# EAGLE board ATTiny Fuse Reset with 12V Charge Pump - 4layer (EAGLE 7.2.0)
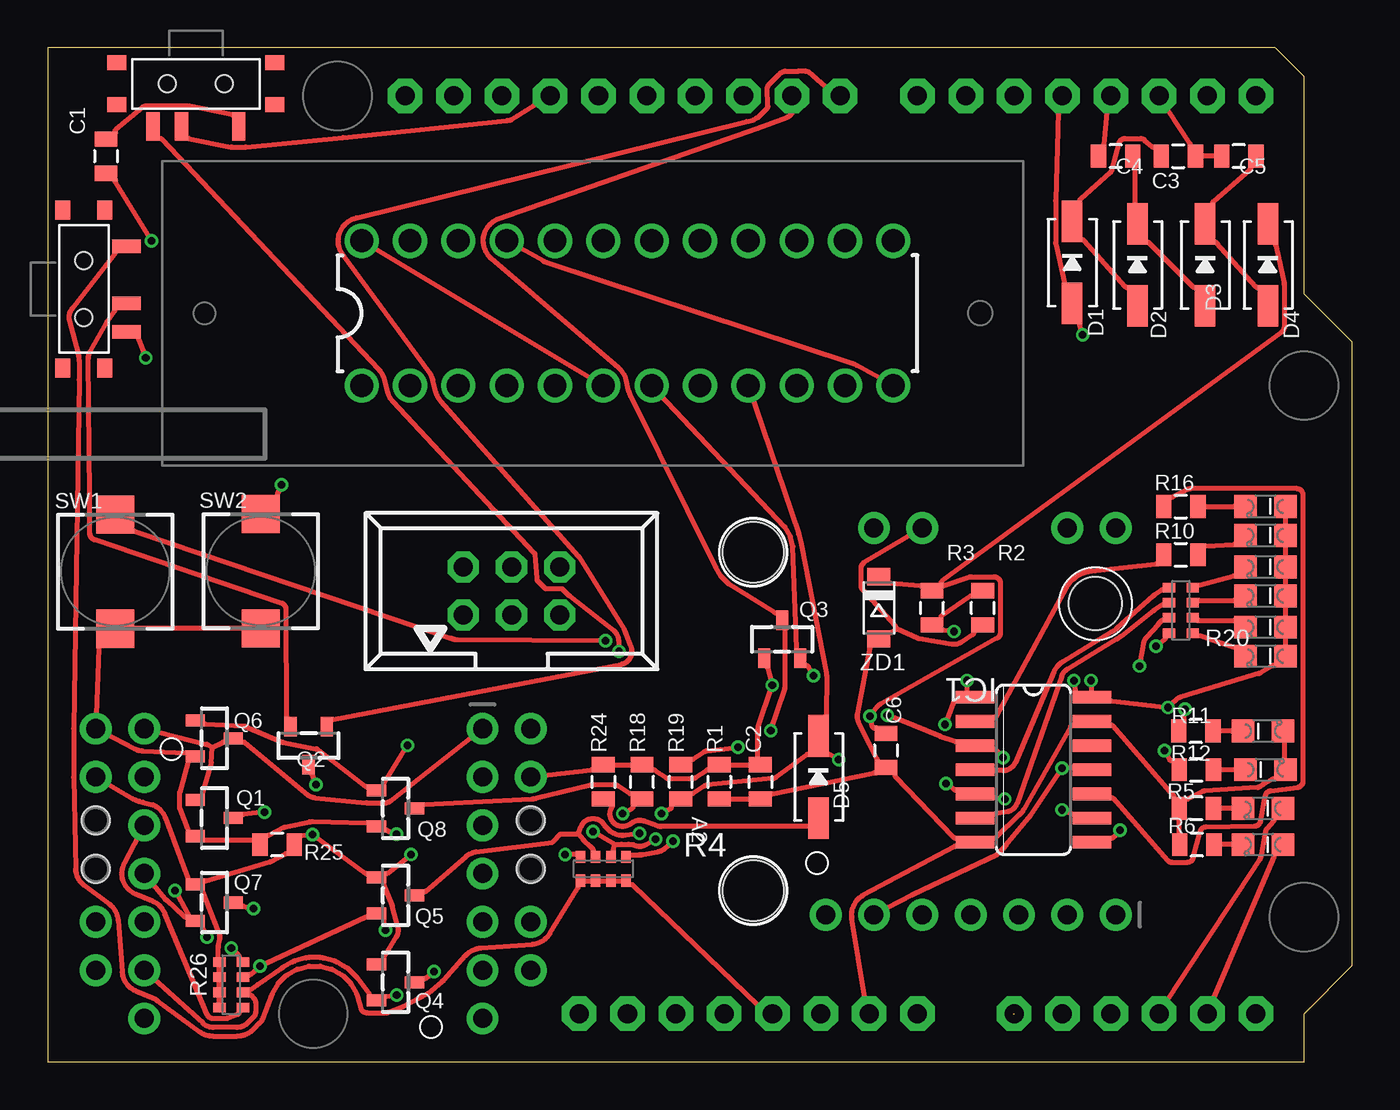
[diagram p0: board, top side]
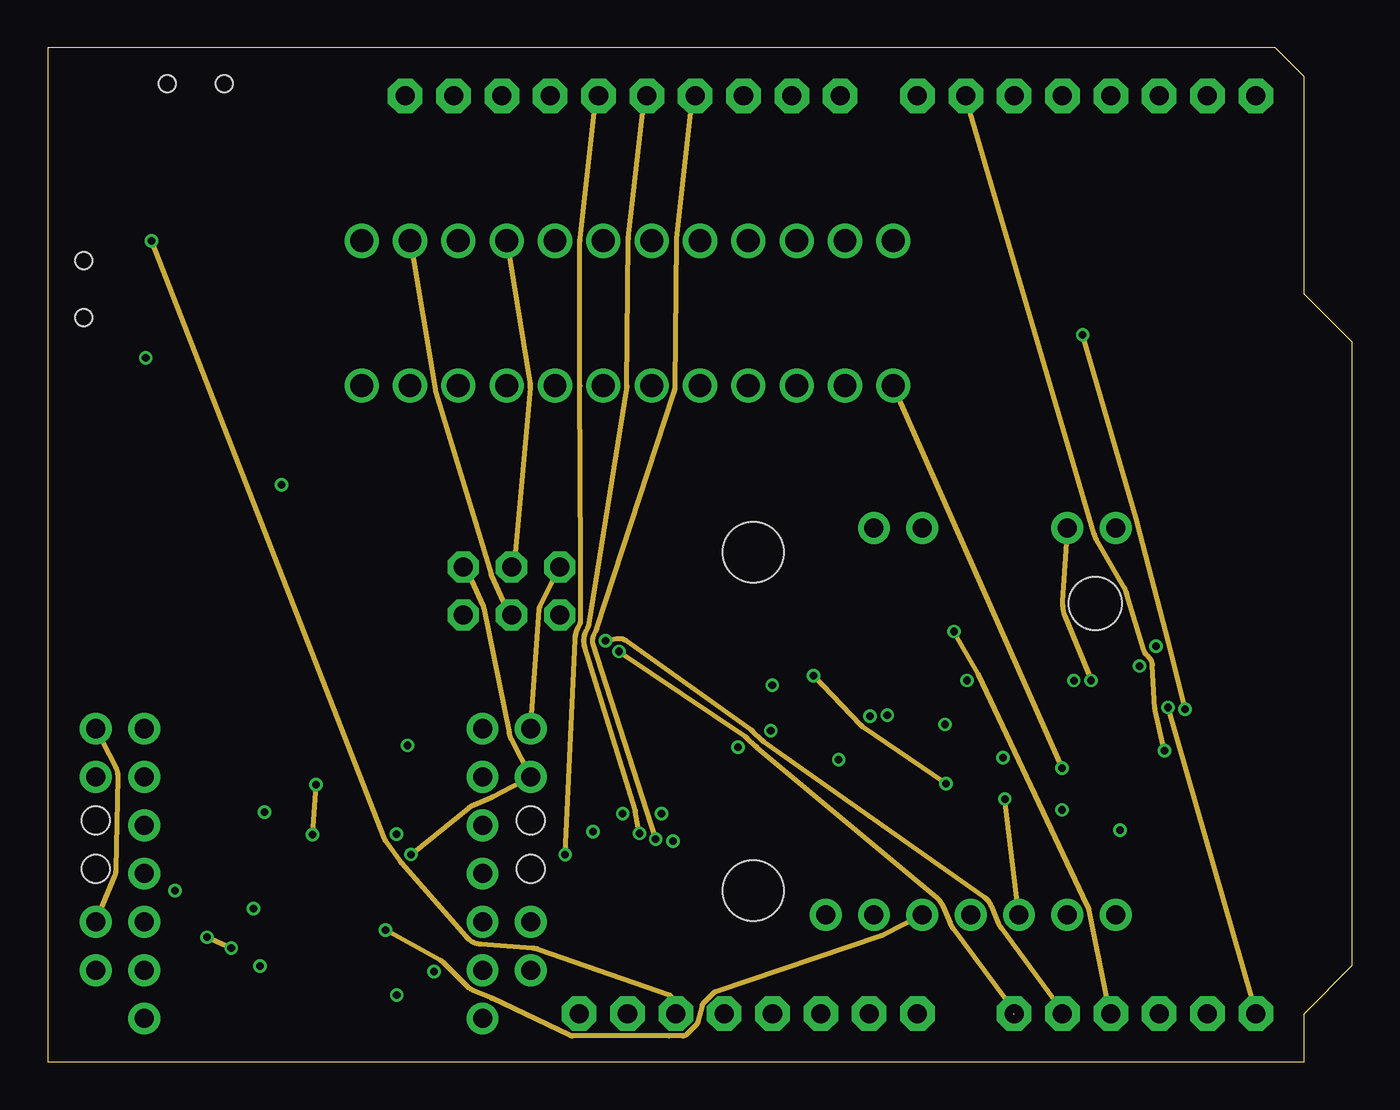
[diagram p1: board, inner layer TOP-1]
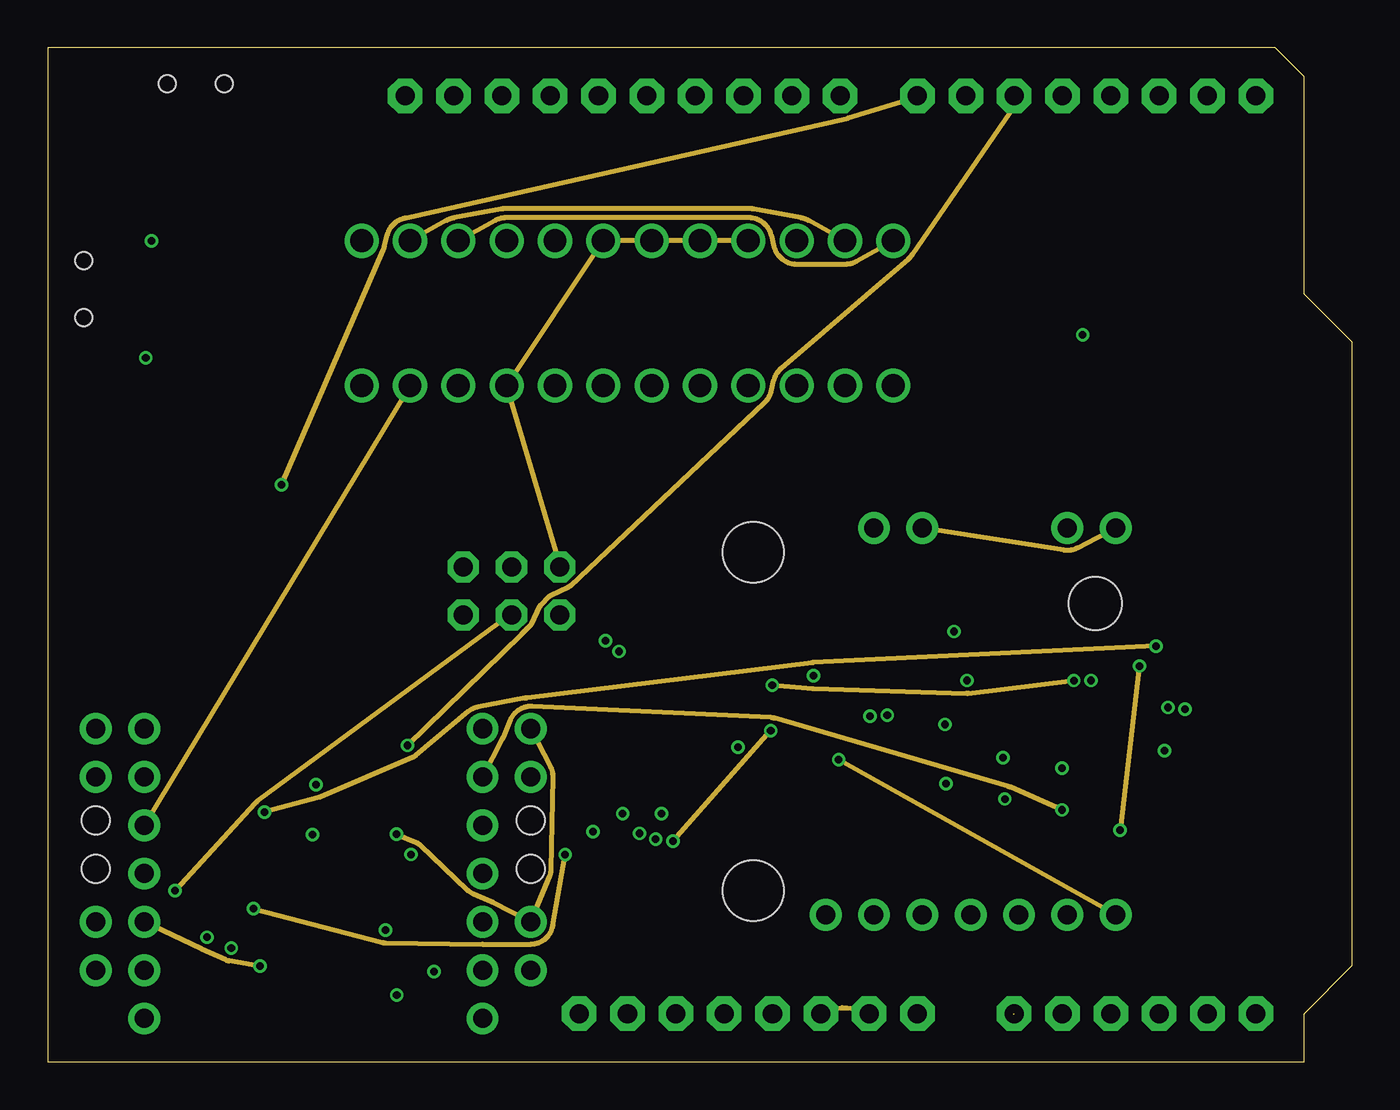
[diagram p2: board, inner layer BOTTOM+1]
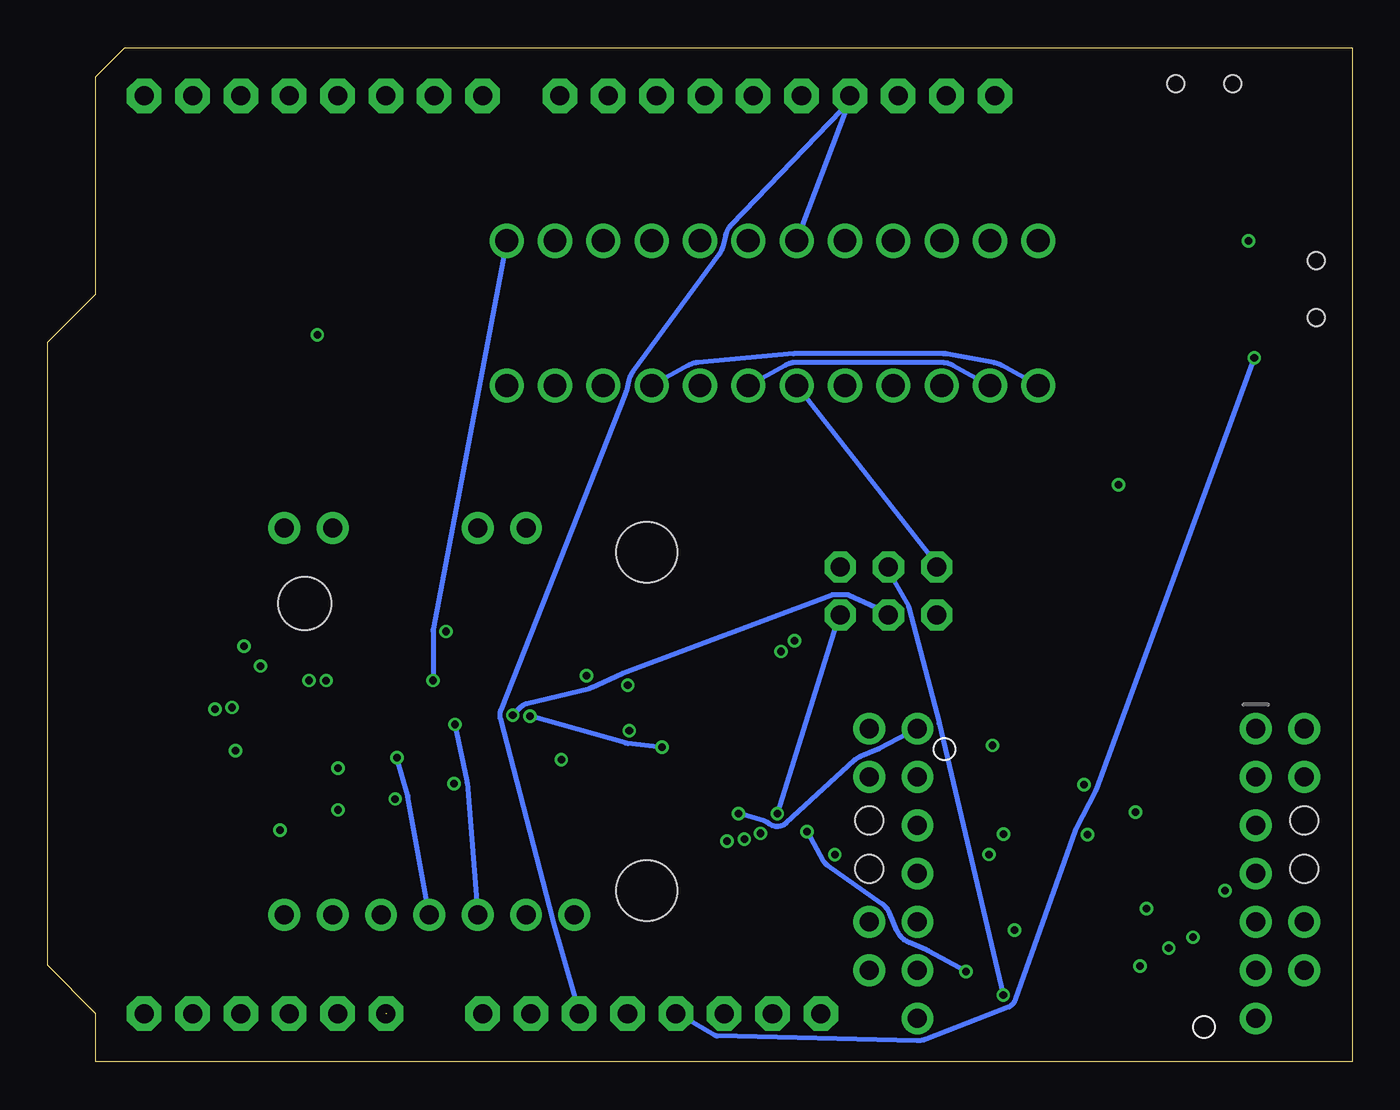
[diagram p3: board, bottom side, seen from below]

Size 68.58 x 53.34 mm. Coordinates in mm from the lower left corner, seen from the top.
Outline: 0,53.34 0,0 66.04,0 66.04,2.54 68.58,5.08 68.58,37.85 66.04,40.39 66.04,51.82 64.52,53.34 0,53.34
Copper layers 1+2+3+16: TOP 0.035mm / dielectric 0.15mm / TOP-1 0.0035mm / dielectric 0.2mm / BOTTOM+1 0.0035mm / dielectric 0.15mm / BOTTOM 0.035mm
Design rules "default": minimum track width 10mil, minimum drill 0.6mm, track to track 8mil, track to pad 8mil, pad to pad 8mil, via to via 8mil, smd to smd 8mil, copper to edge 10mil, drill to drill 8mil, minimum pad ring 0.1mm, minimum via ring 0.1mm, stop-mask expansion 4mil, vias tented up to drill 0mil, thermal gap 10mil
Net classes: 0 default: width 0.254 mm, clearance 0.205 mm
tRestrict: area 35.1,24.9 to 39,28.8; area 35.1,7.1 to 39.1,11.1; area 63.6,33.5 to 68.5,38.4; area 63.8,5.4 to 68.3,9.9; area 13.1,48.7 to 17.4,53; area 11.8,0.4 to 16.3,4.9

## Footprints (pad centres in the part's own frame; a part is rotated, then mirrored left to right if it is on the bottom)
BREAKOUT_TAMI_NOHOLES = drill 1 pad 1.676: 1.PB5 -10.16,-8.89; 2.PB4 -10.16,-6.35; 3.PB3 -10.16,-3.81; 4.PB2 -10.16,-1.27; 5.PB1 -10.16,1.27; 6.PB0 -10.16,3.81; 7.GND -10.16,6.35; 8.GND 10.16,-8.89; 9.VCC 10.16,-6.35; 10.GND 10.16,1.27; 11.BAT 10.16,3.81
BREAKOUT_ATTAMI = drill 1 pad 1.676: 1.PB5 1.27,1.27; 2.PB4 1.27,3.81; 3.PB3 1.27,6.35; 4.PB2 1.27,8.89; 5.PB1 1.27,11.43; 6.PB0 1.27,13.97; 7.GND 1.27,16.51; 8.GND 21.59,1.27; 9.VCC 21.59,3.81; 10.GND 21.59,11.43; 11.BAT 21.59,13.97 | hole 2.8: 17.628,2.337 | hole 3.2: 20.32,20.32; 2.54,20.32
0805 = smd 0.8 x 1.2: 1 -0.9,0; 2 0.9,0
SOD-323 = smd 2.184 x 1.067: AQ 2.159,0; CQ -2.159,0
LED-805 = smd 1.2 x 1.2: A 0,-1.05; C 0,1.05
SO14 = smd 0.66 x 2.032: 1 -3.81,-3.073; 2 -2.54,-3.073; 3 -1.27,-3.073; 4 0,-3.073; 5 1.27,-3.073; 6 2.54,-3.073; 7 3.81,-3.073; 8 3.81,3.073; 9 2.54,3.073; 10 1.27,3.073; 11 0,3.073; 12 -1.27,3.073; 13 -2.54,3.073; 14 -3.81,3.073
1X02_PP_HOLES_ONLY = drill 0.889 pad 1.397: 1 0,0; 2 2.54,0 | hole 1.473: 2.54,0; 0,0
SOT23-R = smd 0.635 x 1.016: 1 -0.95,-1; 2 0.95,-1; 3 0,1
0603-ARV = smd 0.5 x 0.65: 1 -1.2,-0.625; 2 -0.4,-0.625; 3 0.4,-0.625; 4 1.2,-0.625; 5 1.2,0.625; 6 0.4,0.625; 7 -0.4,0.625; 8 -1.2,0.625
PUSHBUTTON_SMD_SJ = smd 2 x 2: P$1 3,0; P$2 -3,0
KPS-1290 = smd 0.7 x 1.5: O -2.25,2.25; P 0.75,2.25; S 2.25,2.25 | smd 1 x 0.8: P$1 -4.15,1.1; P$2 -4.15,-1.1; P$3 4.15,-1.1; P$4 4.15,1.1 | hole 0.9: 1.5,0; -1.5,0
ARDUINOR3-BPLACE = drill 1 pad 1.815 octagon: 3V 35.56,2.54; 5V 38.1,2.54; A0 50.8,2.54; A1 53.34,2.54; A2 55.88,2.54; A3 58.42,2.54; A4 60.96,2.54; A5 63.5,2.54; AREF 23.876,50.8; D0 63.5,50.8; D1 60.96,50.8; D2 58.42,50.8; D3 55.88,50.8; D4 53.34,50.8; D5 50.8,50.8; D6 48.26,50.8; D7 45.72,50.8; D8 41.656,50.8; D9 39.116,50.8; D10 36.576,50.8; D11 34.036,50.8; D12 31.496,50.8; D13 28.956,50.8; GND 26.416,50.8; GND1 43.18,2.54; GND2 40.64,2.54; IOREF 30.48,2.54; RESERVED 27.94,2.54; RESET 33.02,2.54; SCL 18.796,50.8; SDA 21.336,50.8; VIN 45.72,2.54
DIL-24-ZIF = drill 1.2 pad 1.8: P$1 -13.97,-3.81; P$2 -11.43,-3.81; P$3 -8.89,-3.81; P$4 -6.35,-3.81; P$5 -3.81,-3.81; P$6 -1.27,-3.81; P$7 1.27,-3.81; P$8 3.81,-3.81; P$9 6.35,-3.81; P$10 8.89,-3.81; P$11 11.43,-3.81; P$12 13.97,-3.81; P$13 13.97,3.81; P$14 11.43,3.81; P$15 8.89,3.81; P$16 6.35,3.81; P$17 3.81,3.81; P$18 1.27,3.81; P$19 -1.27,3.81; P$20 -3.81,3.81; P$21 -6.35,3.81; P$22 -8.89,3.81; P$23 -11.43,3.81; P$24 -13.97,3.81
057-006-1 = drill 1 pad 1.632 octagon: 1 -2.54,-1.27; 2 -2.54,1.27; 3 0,-1.27; 4 0,1.27; 5 2.54,-1.27; 6 2.54,1.27
SOD-123 = smd 0.91 x 1.22: A 1.635,0; C -1.635,0

## Placement (x,y rotation side)
A1  [BREAKOUT_TAMI_NOHOLES]  12.7,8.64 180 top
A2  [BREAKOUT_ATTAMI]  57.4,6.48 90 top
A3  [BREAKOUT_TAMI_NOHOLES]  15.24,8.64 180 bottom
C1  [0805]  3.07,47.63 270 top
C2  [0805]  37.47,14.73 270 top
C3  [0805]  59.44,47.62 0 top
C4  [0805]  56.13,47.62 180 top
C5  [0805]  62.61,47.62 180 top
C6  [0805]  44.07,16.38 270 top
D1  [SOD-323]  53.85,42.04 270 top
D2  [SOD-323]  57.28,41.91 270 top
D3  [SOD-323]  60.83,41.91 270 top
D4  1N4148  [SOD-323]  64.14,41.91 270 top
D5  [SOD-323]  40.51,14.99 270 top
HBEAT  H.B.  [LED-805]  64.01,15.37 270 top
HV_ON  HV on  [LED-805]  63.88,17.4 270 top
IC1  74HC04D  [SO14]  51.82,15.37 270 top
ISP  pmode  [LED-805]  63.88,13.34 90 top
ISP_ERR  err  [LED-805]  63.88,11.43 90 top
JP1  [1X02_PP_HOLES_ONLY]  25.4,10.16 90 top
JP2  [1X02_PP_HOLES_ONLY]  2.54,10.16 90 top
PB0  PB0  [LED-805]  64.01,29.21 90 top
PB1  PB1  [LED-805]  64.01,27.69 90 top
PB2  PB2  [LED-805]  64.01,26.04 90 top
PB3  PB3  [LED-805]  64.01,24.51 90 top
PB4  PB4  [LED-805]  64.01,22.86 90 top
PB5  PB5 rst  [LED-805]  64.01,21.34 90 top
Q1  BSS138  [SOT23-R]  8.76,12.83 270 top
Q2  PMV65XP  [SOT23-R]  13.72,16.64 180 top
Q3  BSS138  [SOT23-R]  38.61,22.23 0 top
Q4  BSS138  [SOT23-R]  18.29,4.19 270 top
Q5  BSS138  [SOT23-R]  18.29,8.76 270 top
Q6  BSS138  [SOT23-R]  8.76,17.02 270 top
Q7  BSS138  [SOT23-R]  8.76,8.38 270 top
Q8  BSS130  [SOT23-R]  18.29,13.34 270 top
R1  4.7K  [0805]  35.31,14.73 270 top
R2  [0805]  49.15,23.88 90 top
R3  [0805]  46.48,23.88 90 top
R4  4k7  [0603-ARV]  29.21,10.16 180 top
R5  [0805]  60.38,13.34 180 top
R6  [0805]  60.4,11.43 180 top
R10  330R  [0805]  59.56,26.67 0 top
R11  [0805]  60.35,17.4 180 top
R12  [0805]  60.38,15.37 0 top
R16  330R  [0805]  59.56,29.21 0 top
R18  4.7K  [0805]  31.24,14.73 90 top
R19  [0805]  33.27,14.73 90 top
R20  330R  [0603-ARV]  59.56,23.75 90 top
R24  [0805]  29.21,14.73 270 top
R25  1k  [0805]  12.06,11.43 180 top
R26  4k7  [0603-ARV]  9.65,4.06 90 top
SW1  [PUSHBUTTON_SMD_SJ]  3.56,25.78 270 top
SW2  [PUSHBUTTON_SMD_SJ]  11.2,25.81 270 top
SW3  SWITCH_SPDT  [KPS-1290]  7.8,51.44 180 top
SW4  SWITCH_SPDT  [KPS-1290]  1.91,40.64 270 top
U1  [ARDUINOR3-BPLACE]  0,0 0 top
U$2  ZIFSOCKET-24  [DIL-24-ZIF]  30.48,39.37 0 top
X1  [057-006-1]  24.38,24.77 0 top
ZD1  [SOD-123]  43.69,23.88 270 top

## Library data of the parts
A1-A3 C1-C6 D1-D5 HBEAT HV_ON ISP ISP_ERR PB0 PB1-PB5 R1-R3 R5 R6 R10-R12 R16 R18 R19 R24 R25 U1 = ATtami
IC1 = 74xx-eu
JP1 JP2 = SparkFun-Connectors
Q1-Q8 SW1 SW2 = microbuilder
R4 R20 R26 = SparkFun-Passives
SW3 SW4 = SparkFun-Electromechanical
U$2 = ATTiny Fuse Reset with 12V Charge Pump
X1 = con-panduit; OC_FARNELL: unknown; OC_NEWARK: unknown
ZD1 = dp_devices

## Nets
11.5V: C6.1 D4.CQ R3.2 R19.2 ZD1.C
ATTINY_VCC: A1.9.VCC A2.9.VCC A3.9.VCC C2.1 IC1.14 PB0.A PB1.A PB2.A PB3.A PB4.A PB5.A Q2.3 Q3.1 Q4.1 Q5.1 Q7.1 R1.1 R18.2 R24.1 R25.1 R26.5 R26.6 R26.7 R26.8 U1.A5 U$2.P$6 U$2.P$24 X1.2
GND: A1.8.GND A1.10.GND A2.8.GND A2.10.GND A3.8.GND A3.10.GND C2.2 C6.2 HBEAT.C HV_ON.C IC1.7 IC1.13 Q1.2 Q6.2 Q8.2 R1.2 R2.1 R5.2 R6.2 R25.2 SW1.P$1 SW2.P$1 SW3.P U1.GND U1.GND1 U1.GND2 U$2.P$4 U$2.P$16 U$2.P$17 U$2.P$18 U$2.P$19 X1.6 ZD1.A
HV/RESET: A1.1.PB5 A2.1.PB5 A3.1.PB5 D5.CQ Q1.1 Q6.3 R19.1 U$2.P$1 U$2.P$9
HV_OFF(RESET): Q6.1 Q8.1 U1.D5
HV_SENSE: R2.2 R3.1 U1.A2
ISP_RESET: Q8.3 R18.1 X1.5
N$1: Q2.2 SW4.P
N$2: Q3.3 R4.1 U1.D9
N$3: SW3.S U1.A0
N$4: HV_ON.A R11.1
N$5: D5.AQ R24.2
N$6: ISP.C R5.1
N$7: A1.2.PB4 IC1.9
N$8: Q4.3 R4.2 U1.D11
N$9: SW1.P$2 U1.A1
N$10: C3.1 D1.CQ D2.AQ
N$11: C4.1 D2.CQ D3.AQ
N$12: C5.1 D3.CQ D4.AQ
N$13: IC1.10 R16.1
N$14: C1.1 SW3.O
N$15: ISP_ERR.C R6.1
N$16: SW4.S U1.3V
N$17: ISP_ERR.A U1.A4
N$18: ISP.A U1.A3
N$19: R12.1 U1.D6
N$20: HBEAT.A R12.2
N$21: IC1.2 R10.1
N$22: SW2.P$2 U1.D7
N$23: PB2.C R20.4
N$24: IC1.4 R20.5
N$25: PB1.C R10.2
N$26: IC1.6 R20.6
N$27: PB0.C R16.2
N$28: IC1.8 R20.7
N$29: PB3.C R20.3
N$30: PB4.C R20.2
N$31: PB5.C R20.1
N$32: Q1.3 R20.8
N$33: C1.2 U1.RESET
N$34: Q7.3 R4.4 U1.D13
N$36: X1.1
N$37: Q5.3 R4.3 U1.D12
P1: C3.2 C5.2 U1.D2
P2: C4.2 U1.D3
PUMP_VCC: D1.AQ R11.2 U1.D4
SCI: A2.3.PB3 A3.3.PB3 IC1.5 Q3.2 R26.1 U$2.P$2 U$2.P$7
SDI_MOSI: A2.6.PB0 A3.6.PB0 IC1.11 Q4.2 R26.2 U$2.P$12 U$2.P$21 X1.4
SDO-SCK: A2.4.PB2 A3.4.PB2 IC1.3 Q7.2 R26.4 U$2.P$14 U$2.P$23 X1.3
SII-MISO: A2.5.PB1 A3.5.PB1 IC1.1 Q5.2 R26.3 U$2.P$13 U$2.P$22
VCC: R4.5 R4.6 R4.7 R4.8 SW4.O U1.5V
VCC_OFF: Q2.1 U1.D8
VIN: U1.VIN

## Tracks (layer width: path | path; a pad name or v marks a point on that pad's centre or on a via)
11.5V  (via drill 0.4 pad 0.7)
  TOP 0.254: R19.2 33.75,15.9 33.87,15.9 arc34 33.94,15.93 34.52,16.31 arc-27 34.67,16.36 v36.28,16.55 | ZD1.C 44.17,25.18 44.3,25.18 arc-5 44.31,25.18 45.87,25.05 arc5 45.88,25.05 46.01,25.05 R3.2 | R3.2 46.95,25.05 | 46.95,25.05 47.08,25.05 arc18 47.12,25.05 48.45,25.49 arc-18 48.55,25.51 49.75,25.51 arc-90 50.08,25.18 50.08,22.58 arc-61 49.91,22.29 43.79,18.83 arc23 43.59,18.66 v43.23,18.18 43.34,17.66 arc77 43.47,17.56 43.6,17.56 C6.1 | D4.CQ 64.54,43.1 64.54,42.98 arc12 64.54,42.95 64.99,40.91 arc-12 65,40.84 65,38.66 arc-54 64.86,38.39 47.01,25.28 arc54 46.95,25.18 46.95,25.05 | 46.95,25.05 R3.2
  BOTTOM 0.254: v36.28,16.55 38.08,16.75 arc10 38.2,16.77 v43.23,18.18
ATTINY_VCC  (via drill 0.4 pad 0.7)
  TOP 0.254: Q2.3 13.91,15.26 13.91,15.13 arc20 13.91,15.09 v14.1,14.58 | Q5.1 17.67,9.9 17.8,9.9 arc38 17.88,9.93 v19.11,10.91 | IC1.14 55.78,18.97 55.91,18.97 arc-6 55.92,18.97 v58.88,18.64 59.31,19.05 arc-27 59.59,19.2 63.65,20.42 arc14 63.73,20.45 64.39,20.84 arc-31 64.46,20.86 64.58,20.86 PB5.A PB4.A PB3.A PB2.A PB1.A PB0.A | v53.94,20.06 54,19.52 arc-7 54,19.51 54,19.38 IC1.14 | Q3.1 37.85,20.84 37.85,20.72 arc15 37.85,20.68 v38.09,19.81 37.36,17.64 arc18 37.33,17.43 37.33,15.9 C2.1 R1.1 34.83,15.36 34.71,15.36 arc34 34.64,15.34 34.06,14.96 arc-34 33.87,14.9 32.67,14.9 arc-34 32.49,14.96 31.91,15.34 arc34 31.84,15.36 31.71,15.36 R18.2 R24.1 28.74,15.36 28.61,15.36 arc7 28.59,15.36 A3.9.VCC | Q7.1 8.14,9.52 8.27,9.52 arc16 8.31,9.53 11.66,10.51 arc11 11.72,10.54 12.51,10.94 arc-27 12.56,10.96 12.69,10.96 R25.1 13.24,11.9 13.37,11.9 arc6 13.38,11.9 v13.92,11.96 16.7,9.93 arc36 16.78,9.9 16.91,9.9 Q5.1 | Q7.1 8.14,9.14 8.14,9.01 arc22 8.15,8.97 9.01,6.81 arc-33 9.04,6.43 8.98,6.11 arc11 8.97,5.98 8.97,5.39 R26.5 R26.6 R26.7 R26.8 | Q4.1 17.67,5.33 17.67,5.46 arc-32 17.69,5.53 18.34,6.58 arc47 18.42,7.12 18.12,8.22 arc6 18.11,8.25 17.68,9.35 arc-21 17.67,9.4 17.67,9.52 Q5.1 | v54.84,20.06 54.84,19.38 IC1.14 | U$2.P$24 U$2.P$6 | A1.9.VCC 4.47,13.85 arc4 5.01,13.65 5.54,13.52 arc-46 6.17,12.86 7.37,9.69 arc-21 7.38,9.65 7.38,9.52 Q7.1
  TOP-1 0.254: 21.99,26.01 arc-21 22.27,25.33 22.9,23.95 arc-13 22.92,23.87 24.25,17.29 arc16 24.36,16.99 A3.9.VCC 23.4,13.95 arc-5 23.32,13.91 22.41,13.52 arc16 22.12,13.35 v19.11,10.91 | v14.1,14.58 v13.92,11.96 | A2.9.VCC 53.34,24.22 arc26 53.46,23.45 v54.84,20.06 | v58.88,18.64 63.27,3.41 arc-16 63.41,2.49
  BOTTOM+1 0.254: v38.09,19.81 40.2,19.64 arc3 40.24,19.63 48.3,19.38 arc9 48.4,19.39 v53.94,20.06
  BOTTOM 0.254: U$2.P$6 22.26,26.71 arc-7 21.86,26.06
GND  (via drill 0.4 pad 0.7)
  TOP 0.254: 44.62,22.78 44.37,22.59 arc-37 44.3,22.57 44.17,22.57 ZD1.A 43.2,21.91 43.2,21.79 arc-11 43.2,21.76 42.55,18.31 arc37 42.61,17.89 43.17,16.74 43.17,16.73 43.58,15.94 arc-27 43.6,15.88 43.6,15.76 C6.2 | R6.2 59.49,11.9 59.49,12.86 R5.2 | v18.34,11.98 17.84,12.19 arc23 17.8,12.2 17.67,12.2 Q8.2 16.91,12.57 16.78,12.57 13.93,12.64 arc13 13.78,12.62 12.5,12.36 arc15 12.41,12.32 11.62,11.92 arc-27 11.56,11.9 11.44,11.9 R25.2 10.89,11.69 8.14,11.69 Q1.2 7.38,12.07 7.38,12.19 arc21 7.37,12.24 6.95,13.34 arc-21 6.92,13.46 6.92,14.1 arc-16 6.94,14.19 7.38,15.71 arc16 7.38,15.75 7.38,15.88 Q6.2 7.38,16.26 7.25,16.26 5.03,16.36 arc-25 4.54,16.49 A1.8.GND 2.68,21.78 2.68,21.91 SW1.P$1 4.43,22.79 10.33,22.79 SW2.P$1 | HV_ON.C 65,16.93 65,15.84 HBEAT.C 64.58,14.89 64.46,14.89 arc29 64.4,14.88 63.95,14.63 arc6 63.88,14.59 63.75,14.49 arc-31 63.58,14.44 60.85,14.27 arc24 60.72,14.23 59.93,13.82 arc-27 59.88,13.81 59.75,13.81 R5.2 | IC1.7 47.85,11.76 47.73,11.76 arc-46 47.63,11.8 44.58,14.99 arc-44 44.54,15.08 44.54,15.21 C6.2 | R1.2 C2.2 37.94,14.11 38.06,14.11 arc12 38.09,14.11 43.44,15.21 arc-12 43.47,15.21 43.6,15.21 C6.2 | R5.2 59.2,13.81 59.2,13.94 arc41 59.17,14.02 56,17.66 arc49 55.91,17.7 55.78,17.7 IC1.13 54,17.7 53.87,17.7 arc61 53.76,17.64 51.3,13.27 arc-17 51.1,13.01 49.85,11.8 arc-44 49.76,11.76 49.63,11.76 IC1.7 | R2.1 48.68,22.7 48.68,22.58 arc-57 48.62,22.47 48.01,22.07 arc-43 47.52,21.97 45.83,22.25 arc-15 45.75,22.27 44.62,22.78 | 43.09,2.62 arc9 42.96,3.4 42.28,7.56 arc-71 42.88,8.78 47.67,11.34 arc-28 47.73,11.35 47.85,11.35 IC1.7
  TOP 0.254: A2.10.GND 42.91,26.25 arc59 42.74,25.97 42.74,25.06 arc42 42.83,24.83 44.55,22.92 arc-27 44.62,22.78 | SW3.P 7.27,48.56 7.4,48.56 arc-12 7.42,48.56 9.63,48.11 arc12 9.7,48.1 10.4,48.1 arc6 10.43,48.1 15.53,48.61 24.14,49.51 arc21 24.38,49.54 25.64,50.34 arc17 26.43,50.87
  TOP-1 0.254: A3.8.GND 25.84,23.83 arc-21 25.87,23.95 26.9,26.01 | A1.10.GND 3.53,9.75 arc21 3.61,10.14 3.71,14.96 arc29 3.58,15.53 A1.8.GND
  BOTTOM+1 0.254: 40.63,2.6 arc-45 40.72,2.63 40.69,2.63 arc-45 43.07,2.6 | A2.8.GND 54.13,27.03 arc-36 53.41,26.91 A2.10.GND | v18.34,11.98 19.38,11.54 arc-21 19.58,11.41 22.06,9.06 arc20 22.4,8.83 23.32,8.44 arc-4 23.4,8.4 A3.10.GND 26.39,9.75 arc21 26.47,10.14 26.57,14.96 arc29 26.44,15.53 A3.8.GND | 26.87,26.03 arc17 26.73,26.82 U$2.P$4 U$2.P$19 U$2.P$18 U$2.P$17 U$2.P$16
  BOTTOM 0.254: U$2.P$19 26.64,49.92 arc-21 26.38,50.72 | 26.47,50.81 26.86,50.05 32.64,44.03 arc-30 32.95,43.48 33.09,42.88 arc22 33.3,42.45 37.82,36.29 arc-22 38.02,35.86 38.18,35.26 arc7 38.23,35.11 44.77,18.49 arc-36 44.79,18.07 42.02,7.45 arc-1 42.02,7.42 40.87,3.41 arc16 40.61,2.62
HV/RESET  (via drill 0.4 pad 0.7)
  TOP 0.254: 8.65,16.53 9.2,16.81 arc-28 9.26,16.83 9.38,16.83 Q6.3 10.14,16.83 10.27,16.83 arc-40 10.35,16.8 13.66,14.05 arc34 14.03,13.9 16.75,13.64 arc6 16.78,13.63 17.8,13.63 arc38 18,13.71 A1.1.PB5 | Q1.1 8.14,13.97 8.14,14.1 arc-16 8.15,14.13 8.59,15.66 arc12 8.6,15.73 8.65,16.53 | v32.26,13.06 32.74,13.32 arc61 32.8,13.43 32.8,13.56 R19.1 33.75,14.11 33.87,14.11 arc34 33.94,14.13 34.52,14.51 arc-28 34.67,14.56 38.1,14.9 arc30 38.26,14.96 39.91,16.16 arc-36 39.98,16.18 40.11,16.18 D5.CQ | v41.58,15.9 41.11,16.16 arc30 41.05,16.18 40.92,16.18 D5.CQ | A3.1.PB5 8.35,16.71 arc-20 8.46,16.66 8.65,16.53 | U$2.P$9 39.47,27.78 arc-4 39.48,27.75 39.61,27.25 arc-4 39.62,27.2 40.93,20.45 arc-12 40.94,20.31 40.92,18.24 40.92,18.11 D5.CQ
  BOTTOM+1 0.254: A2.1.PB5 v41.58,15.9
  BOTTOM 0.254: U$2.P$1 18.45,36.64 arc-19 18.83,36.77 21.29,37.22 arc-10 21.59,37.25 24.13,37.25 29.21,37.25 arc-5 29.36,37.24 34.4,36.79 arc-24 34.89,36.64 U$2.P$9 | A1.1.PB5 24.86,16.49 arc5 24.95,16.45 25.85,16.07 arc-20 26.19,15.85 29.76,12.56 arc83 30.67,12.54 30.66,12.54 arc-24 30.92,12.68 v32.26,13.06
HV_OFF(RESET)  (via drill 0.4 pad 0.7)
  TOP 0.254: Q6.1 8.14,17.78 8.27,17.78 8.28,17.78 10.29,17.67 arc-20 10.4,17.64 12.32,16.82 arc12 12.38,16.8 14.1,16.47 arc-27 14.24,16.41 16.7,14.5 arc38 16.78,14.47 16.91,14.47 Q8.1 17.67,14.48 17.67,14.6 arc-32 17.69,14.67 v18.91,16.65
  BOTTOM+1 0.254: v18.91,16.65 24.93,22.5 25.37,22.95 arc20 25.44,23.04 25.87,23.95 arc-20 25.93,24.04 26.38,24.48 arc-20 26.47,24.55 27.38,24.98 arc18 27.46,25.04 37.67,34.66 arc33 38.02,35.26 38.18,35.86 arc-35 38.57,36.49 45.25,42.25 arc15 45.47,42.48 50.56,49.89 arc34 50.83,50.85
HV_SENSE  (via drill 0.4 pad 0.7)
  TOP 0.254: v47.63,22.64 47.1,22.7 arc7 47.08,22.7 46.95,22.7 R3.1 46.95,23.25 46.95,23.38 arc-56 47.01,23.48 48.48,24.48 arc-34 48.55,24.5 48.68,24.5 R2.2
  TOP-1 0.254: 55.79,2.62 arc11 55.66,3.4 54.74,7.98 arc14 54.65,8.25 48.94,20.35 arc4 48.91,20.4 v47.63,22.64
ISP_RESET  (via drill 0.4 pad 0.7)
  TOP 0.254: v30.23,13.06 30.7,13.32 arc62 30.77,13.43 30.77,13.56 R18.1 30.77,14.11 30.64,14.11 arc-34 30.57,14.13 29.99,14.51 arc34 29.81,14.56 28.61,14.56 arc14 28.53,14.55 25.68,13.85 arc-11 25.46,13.82 19.8,13.53 19.67,13.53 Q8.3
  BOTTOM 0.254: 26.98,23.5 arc18 26.99,23.46 v30.23,13.06
N$1
  TOP 0.254: Q2.2 12.58,18.02 12.58,18.15 12.53,23.81 arc71 12.31,24.12 2.45,27.47 arc-71 2.22,27.78 2.22,29.78 2.15,36.99 arc-24 2.18,37.23 3.1,38.88 arc-11 3.13,38.93 3.51,39.47 arc35 3.53,39.54 3.53,39.67 SW4.P
N$2  (via drill 0.4 pad 0.7)
  TOP 0.254: R4.1 30.53,10.89 31.11,10.89 arc10 31.31,10.91 32.08,11.05 arc31 32.41,11.21 v32.87,11.62 | 39.15,50.85 arc-45 39.11,49.87 arc-24 38.9,49.69 37.33,49.1 arc-1 37.32,49.09 23.71,44.34 arc119 23.33,42.24 30.01,36.49 arc-35 30.41,35.86 30.55,35.26 arc12 30.65,35.01 35.12,26.01 35.38,25.56 arc15 35.4,25.53 35.77,25.16 arc13 35.79,25.14 38.22,23.62 arc32 38.29,23.61 38.42,23.61 Q3.3 38.77,22.84 38.77,19.81 arc-18 38.73,19.6 v38.01,17.43
  BOTTOM+1 0.254: v32.87,11.62 v38.01,17.43
N$3  (via drill 0.4 pad 0.7)  (1 unrouted)
  TOP 0.254: SW3.S 5.77,48.56 5.9,48.56 arc-47 5.99,48.52 17.41,36.41 arc-29 17.71,35.86 17.85,35.26 arc28 18.13,34.74 25.56,26.77 arc-16 25.62,26.69 25.72,25.45 25.72,25.34 26.16,24.89 27.04,24.89 27.38,24.55 arc-13 27.44,24.51 29.75,22.69 arc-50 30.01,22.18 v30.03,21.59
  TOP-1 0.254: v30.03,21.59 36.66,17.12 arc-10 36.75,17.05 37.22,16.6 arc4 37.28,16.55 46.73,8.64 arc-27 47.05,8.2 47.44,7.29 arc14 47.57,7.05 50.35,3.3 arc8 50.74,2.53
N$4
  TOP 0.254: HV_ON.A 62.36,17.4 62.23,17.4 61.65,17.4 61.52,17.4 R11.1
N$5
  TOP 0.254: D5.AQ 40.11,12.38 39.98,12.38 32.26,12.38 arc-19 32.03,12.42 31.33,12.66 arc60 30.66,12.54 30.67,12.54 arc-74 29.84,12.5 arc-90 29.67,13.41 29.68,13.43 29.68,13.56 R24.2
N$6
  TOP 0.254: ISP.C 62.36,13.34 62.23,13.34 61.68,13.34 61.55,13.34 R5.1
N$7  (via drill 0.4 pad 0.7)
  TOP 0.254: IC1.9 54,13.03 53.87,13.03 arc-23 53.82,13.04 v53.31,13.26
  BOTTOM+1 0.254: v53.31,13.26 50.58,14.46 arc7 50.5,14.49 38.2,18.08 arc14 38.04,18.11 25.45,18.7 arc70 24.32,17.98 23.94,17.07 arc-5 23.9,16.99 A1.2.PB4
N$8  (via drill 0.4 pad 0.7)
  TOP 0.254: R4.2 29.73,10.98 29.73,11.11 arc-11 29.73,11.13 29.8,11.44 | 29.8,11.44 v28.66,12.12 | Q4.3 19.67,4.38 19.8,4.38 arc39 19.88,4.41 v20.31,4.76 | 29.8,11.44 30.15,11.44 30.16,11.44 30.53,11.44 30.66,11.44 arc-26 30.81,11.41 30.81,11.41 arc56 31.44,11.43 v31.96,11.72
  TOP-1 0.254: v31.96,11.72 28.68,21.95 arc-44 28.72,22.46 28.8,22.62 arc8 28.87,22.79 32.92,35.18 arc18 32.98,35.55 33.06,43.19 arc-6 33.06,43.32 33.81,49.95 arc6 34.07,50.85
  BOTTOM 0.254: v20.31,4.76 22.3,5.85 arc-6 22.4,5.9 23.32,6.29 arc44 23.94,6.91 24.32,7.82 arc-32 24.73,8.32 27.6,10.35 arc26 27.8,10.57 v28.66,12.12
N$9  (via drill 0.4 pad 0.7)
  TOP 0.254: SW1.P$2 4.43,27.91 4.56,27.91 arc-18 4.59,27.9 21.23,22.27 arc16 21.55,22.21 v29.33,22.16
  TOP-1 0.254: v29.33,22.16 29.91,22.26 arc-45 30.43,22.14 36.95,17.48 arc-8 37.07,17.38 37.54,16.93 arc8 37.62,16.87 49.19,8.7 arc-32 49.59,8.2 49.98,7.29 arc14 50.11,7.05 52.89,3.3 arc8 53.28,2.65
N$10
  TOP 0.254: D2.AQ 56.87,40.72 56.74,40.72 arc-48 56.65,40.76 54.48,43.19 arc48 54.38,43.23 54.25,43.23 D1.CQ 54.25,45.16 54.25,45.29 arc-48 54.3,45.38 55.86,46.78 arc34 55.96,46.94 56.31,48.31 arc-75 56.63,48.56 57.43,48.56 arc-41 57.65,48.48 58.05,48.13 arc41 58.14,48.1 58.26,48.1 C3.1
N$11
  TOP 0.254: D3.AQ 60.43,40.72 60.3,40.72 arc-45 60.21,40.75 57.9,43.07 arc45 57.81,43.1 57.68,43.1 D2.CQ 57.16,45.03 57.16,45.16 57.16,47.02 57.16,47.15 C4.1
N$12
  TOP 0.254: D4.AQ 63.73,40.72 63.6,40.72 arc-48 63.51,40.76 61.46,43.06 arc48 61.37,43.1 61.24,43.1 D3.CQ 61.24,45.03 61.24,45.16 arc-49 61.28,45.26 63.2,46.93 arc49 63.24,47.02 63.24,47.15 C5.1
N$13
  TOP 0.254: IC1.10 55.78,13.89 55.91,13.89 arc-49 56,13.85 58.85,10.61 arc49 59.1,10.5 59.9,10.5 arc75 60.22,10.75 60.58,12.11 arc-74 60.9,12.36 63.44,12.4 arc79 63.76,12.67 64,14 arc-72 64.29,14.27 65.7,14.44 arc83 65.99,14.77 65.99,29.81 arc90 65.66,30.14 60.06,30.14 arc27 59.91,30.11 59.12,29.7 arc-27 59.06,29.68 58.94,29.68 R16.1
N$14
  TOP 0.254: SW3.O 9.82,49.81 9.7,49.81 arc-12 9.67,49.81 7.46,50.26 arc12 7.4,50.27 5.2,50.27 arc40 4.98,50.19 3.59,49.02 arc50 3.54,48.93 3.54,48.8 C1.1
N$15
  TOP 0.254: ISP_ERR.C 62.36,11.43 62.23,11.43 61.7,11.43 61.57,11.43 R6.1
N$16  (via drill 0.4 pad 0.7)
  TOP 0.254: SW4.S 4.78,38.17 4.78,38.04 arc21 4.79,37.99 v5.16,37.03
  BOTTOM 0.254: v5.16,37.03 13.46,14.34 arc7 13.49,14.27 14.52,12.27 arc-8 14.56,12.19 17.71,3.29 arc49 18.11,2.88 22.44,1.2 arc23 22.89,1.12 33.38,1.37 arc27 33.52,1.41 35.57,2.61
N$17
  TOP 0.254: ISP_ERR.A 64.46,10.96 64.46,10.83 arc-24 64.45,10.78 61.19,3.18 arc24 60.93,2.62
N$18
  TOP 0.254: ISP.A 64.46,12.86 64.46,12.73 arc-41 64.43,12.65 64.08,12.25 arc30 64,12.09 63.76,10.77 arc-23 63.71,10.65 58.87,3.31 arc-12 58.48,2.65
N$19  (via drill 0.4 pad 0.7)
  TOP 0.254: R12.1 59.2,15.84 59.08,15.84 arc-60 58.97,15.9 v58.7,16.37
  TOP-1 0.254: v58.7,16.37 58.21,18.49 arc-9 58.2,18.6 58.07,20.86 arc47 57.82,21.34 | 57.82,21.34 | 57.82,21.34 arc-33 57.61,21.67 56.72,24.6 arc13 56.57,24.97 55.12,27.48 arc-14 55.01,27.74 48.48,49.93 arc-16 48.35,50.85
N$20
  TOP 0.254: HBEAT.A 62.48,15.37 62.36,15.37 61.68,15.37 61.55,15.37 R12.2
N$21
  TOP 0.254: IC1.2 49.63,18.11 49.76,18.11 arc61 49.87,18.18 53.55,24.93 arc-55 54.88,25.82 58.25,26.2 arc-6 58.26,26.2 58.39,26.2 R10.1
N$22  (via drill 0.4 pad 0.7)
  TOP 0.254: SW2.P$2 12.07,29.68 12.07,29.81 arc-23 12.09,29.86 v12.3,30.35
  BOTTOM+1 0.254: v12.3,30.35 17.64,42.69 arc9 17.71,42.88 17.85,43.48 arc-63 18.78,44.38 42.08,49.64 45.73,50.74
N$23
  TOP 0.254: R20.4 60.39,25.07 60.51,25.07 arc15 60.55,25.08 62.33,25.56 arc-15 62.36,25.56 62.48,25.56 PB2.C
N$24
  TOP 0.254: R20.5 58.74,24.83 58.61,24.83 arc34 58.54,24.8 58.17,24.56 arc8 58.08,24.49 56.22,22.82 arc-11 55.97,22.62 53.34,21.04 arc36 52.89,20.51 50.85,15.73 arc-67 50.22,15.32 49.76,15.32 49.63,15.32 IC1.4
N$25
  TOP 0.254: R10.2 60.74,27.14 60.86,27.14 60.87,27.14 62.35,27.21 62.36,27.21 62.48,27.21 PB1.C
N$26
  TOP 0.254: R20.6 58.74,24.03 58.61,24.03 arc34 58.54,24 58.17,23.76 arc4 58.12,23.72 56.42,22.38 arc-7 56.2,22.23 53.58,20.64 arc39 53.29,20.28 50.95,13.61 arc-60 50.44,13.16 49.78,13.03 arc-11 49.76,13.03 49.63,13.03 IC1.6
N$27
  TOP 0.254: R16.2 60.74,29.21 60.86,29.21 62.36,29.21 62.48,29.21 PB0.C
N$28  (via drill 0.4 pad 0.7)
  TOP 0.254: v56.37,12.19 56,11.8 arc-47 55.91,11.76 55.78,11.76 IC1.8 | R20.7 58.74,23.23 58.61,23.23 arc47 58.52,23.19 58.37,23.03 arc2 58.36,23.02 57.75,22.32 arc31 57.59,21.98 v57.39,20.82
  BOTTOM+1 0.254: v57.39,20.82 v56.37,12.19
N$29
  TOP 0.254: R20.3 60.39,24.27 60.51,24.27 62.36,24.27 62.48,24.27 PB3.C
N$30
  TOP 0.254: R20.2 60.39,23.23 60.51,23.23 62.36,23.23 62.48,23.23 PB4.C
N$31
  TOP 0.254: R20.1 60.39,22.43 60.51,22.43 arc-19 60.55,22.42 62.32,21.82 arc19 62.36,21.81 62.48,21.81 PB5.C
N$32  (via drill 0.4 pad 0.7)
  TOP 0.254: v11.4,13.14 10.29,13.02 arc-6 10.27,13.02 10.14,13.02 Q1.3 | R20.8 58.74,22.43 58.74,22.3 arc-52 58.69,22.2 v58.26,21.87
  BOTTOM+1 0.254: v58.26,21.87 40.23,21 arc4 40.18,20.99 25.2,19.14 arc3 25.11,19.13 22.65,18.68 arc29 22.11,18.43 19.35,16.12 arc-17 19.18,16.02 14.37,13.95 arc-8 14.28,13.92 v11.4,13.14
N$33  (via drill 0.4 pad 0.7)
  TOP 0.254: C1.2 3.54,46.45 3.54,46.33 arc32 3.56,46.26 v5.46,43.18
  TOP-1 0.254: v5.46,43.18 17.71,11.73 arc14 17.79,11.58 18.55,10.51 arc5 18.6,10.46 21.98,6.6 arc44 22.77,6.2 25.49,5.99 arc-15 25.79,5.93 32.67,3.53 arc-26 32.76,3.47 arc-45 33.05,2.49
N$34  (via drill 0.4 pad 0.7)
  TOP 0.254: R4.4 27.89,10.9 v27.2,10.9 | Q7.3 10.14,8.19 10.27,8.19 arc-14 10.3,8.19 v10.83,8.06
  TOP-1 0.254: v27.2,10.9 27.73,22.23 arc-24 27.89,22.87 27.98,23.04 arc26 28.01,23.18 28.01,26.35 27.98,35.56 27.98,43.18 arc-6 27.98,43.32 28.73,49.95 arc6 28.86,50.72
  BOTTOM+1 0.254: v10.83,8.06 17.58,6.28 arc14 17.75,6.26 22.85,6.2 arc1 22.86,6.2 25.4,6.2 arc80 26.55,7.17 v27.2,10.9
N$37  (via drill 0.4 pad 0.7)
  TOP 0.254: Q5.3 19.67,8.95 19.8,8.95 arc39 19.88,8.98 21.99,10.81 arc-29 22.53,11.06 26.54,11.56 26.97,11.98 27.89,11.98 | 27.89,11.98 28.02,12.35 arc-129 29.25,12.47 | 29.25,12.47 | 29.25,12.47 arc66 30.36,11.93 v31.11,12.02 | 27.89,11.98 28.14,11.68 arc7 28.2,11.62 28.49,11.35 28.65,11.2 arc-47 28.69,11.11 28.69,10.98 R4.3
  TOP-1 0.254: v31.11,12.02 30.9,13.18 arc7 30.88,13.27 28.24,21.82 arc-44 28.3,22.66 28.39,22.83 arc17 28.46,23.06 30.43,35.37 arc9 30.44,35.55 30.52,43.19 arc-6 30.52,43.32 31.27,49.95 arc6 31.53,50.85
P1
  TOP 0.254: 58.48,50.81 arc-11 58.87,50.03 60.04,48.3 arc-34 60.06,48.23 60.06,48.1 C3.2 C5.2
P2
  TOP 0.254: 55.91,50.85 arc-5 55.66,49.95 55.51,48.24 arc5 55.51,48.23 55.51,48.1 C4.2
PUMP_VCC  (via drill 0.4 pad 0.7)
  TOP 0.254: v54.4,38.23 54.26,38.75 arc-15 54.25,38.79 54.25,38.91 D1.AQ 53.44,40.84 53.44,40.97 arc12 53.44,41 52.99,43.03 arc-12 52.98,43.1 52.98,45.29 52.98,45.3 53.12,49.96 53.37,50.72 | R11.2 59.72,17.87 59.72,18 arc-6 59.72,18.01 v59.78,18.55
  TOP-1 0.254: v59.78,18.55 58.92,22.03 arc1 58.92,22.04 57.27,28.36 arc2 57.26,28.39 v54.4,38.23
SCI  (via drill 0.4 pad 0.7)
  TOP 0.254: R26.1 10.08,2.74 10.08,2.61 arc-70 9.99,2.5 9.47,2.3 arc-20 9.35,2.28 8.7,2.28 arc-67 8.39,2.49 6.16,7.82 arc44 5.53,8.45 4.63,8.83 arc-95 4.04,10.45 A3.3.PB3 | v50.31,13.83 49.77,13.89 arc7 49.76,13.89 49.63,13.89 IC1.5 47.85,14.3 47.73,14.3 arc-36 47.65,14.32 v47.22,14.64 | v40.26,20.32 39.98,20.78 arc59 39.88,20.84 39.75,20.84 Q3.2 39.37,21.61 39.37,21.73 39.37,21.74 39.17,27.1 arc13 39.17,27.13 39.04,27.63 arc15 39.02,27.66 38.76,28.11 arc13 38.74,28.13 U$2.P$7
  TOP-1 0.254: A2.3.PB3 v50.31,13.83 | v47.22,14.64 42.84,17.62 arc-12 42.73,17.71 v40.26,20.32
  BOTTOM+1 0.254: U$2.P$2 A3.3.PB3
  BOTTOM 0.254: U$2.P$7 29.81,36.64 arc29 29.21,36.79 24.13,36.79 21.59,36.79 arc29 20.99,36.64 U$2.P$2
SDI_MOSI  (via drill 0.4 pad 0.7)
  TOP 0.254: 15.58,5.04 15.71,4.96 arc-15 15.83,4.87 16.25,4.45 arc-7 16.3,4.39 16.88,3.64 arc-38 16.91,3.56 16.91,3.43 Q4.2 17.67,3.43 17.8,3.43 arc8 17.82,3.43 v18.35,3.51 | 15.58,5.04 | 15.58,5.04 15.19,5.26 arc15 15.05,5.32 14.48,5.47 arc15 14.32,5.49 13.75,5.49 13.73,5.49 arc15 13.58,5.47 13.03,5.33 13,5.32 arc15 12.86,5.26 12.37,4.98 | 12.37,4.98 | 12.37,4.98 12.35,4.96 arc5 12.31,4.94 11.05,4.06 arc-1 11.04,4.06 10.67,3.81 arc-34 10.6,3.79 10.47,3.79 R26.2 10.47,3.54 10.6,3.54 arc-47 10.69,3.5 10.84,3.34 arc-43 10.93,3.11 10.93,2.61 arc-45 10.84,2.38 10.51,2.05 arc-45 9.95,1.82 8.7,1.82 arc-42 8.17,2.03 A3.6.PB0 | IC1.11 54,15.45 v53.32,15.45 51.64,12.94 arc-6 51.55,12.81 50.37,11.38 arc-5 50.33,11.34 50,10.99 arc-20 49.9,10.93 45.47,8.8 arc2 45.43,8.79 A2.6.PB0 | U$2.P$12 42.51,36.64 arc11 42.3,36.73 26.28,42.01 arc-11 26.07,42.1 U$2.P$21
  TOP-1 0.254: v53.32,15.45 U$2.P$12 | U$2.P$21 25.35,35.76 arc-15 25.36,35.45 24.57,26.8 arc5 24.44,26.03
  BOTTOM 0.254: 24.49,26.01 23.33,23.95 arc10 23.31,23.89 21.73,17.82 arc1 21.72,17.8 v18.35,3.51
SDO-SCK  (via drill 0.4 pad 0.7)
  TOP 0.254: v50.22,16 49.85,16.39 arc46 49.76,16.43 49.63,16.43 IC1.3 47.85,16.84 47.73,16.84 arc-19 47.69,16.85 46.95,17.1 arc-3 46.91,17.12 44.8,17.99 arc2 44.79,17.99 v44.13,18.24 | v6.7,9.02 7.37,7.81 arc-29 7.38,7.75 7.38,7.62 | 7.38,7.62 Q7.2 | v8.38,6.56 8.15,7.06 arc-24 8.14,7.11 8.14,7.24 Q7.2 | R26.4 10.08,5.39 10.08,5.51 arc46 10.04,5.61 v9.65,5.98 | Q7.2 7.38,7.62 | 7.38,7.62 7.25,7.62 arc-43 7.17,7.66 6.24,8.52 arc-8 6.17,8.58 A3.4.PB2
  TOP-1 0.254: U$2.P$23 20.38,35.35 arc7 20.41,35.2 23.31,25.63 arc7 23.33,25.59 23.96,24.2 arc19 23.98,24.16 24.36,23.65 | v9.65,5.98 v8.38,6.56
  BOTTOM+1 0.254: U$2.P$14 39.97,44.26 arc19 39.59,44.39 37.14,44.84 arc10 36.83,44.87 24.13,44.87 arc10 23.82,44.84 21.37,44.39 arc19 20.99,44.26 U$2.P$23 | 24.36,23.6 arc-9 23.71,23.08 11,13.69 arc11 10.9,13.6 v6.7,9.02
  BOTTOM 0.254: A2.4.PB2 49.64,13.95 arc-6 49.65,14.02 v50.22,16 | v44.13,18.24 43.71,18.66 arc32 43.39,18.85 40.1,19.65 arc-11 39.98,19.7 38.37,20.43 arc4 38.33,20.45 27.35,24.56 arc21 27.24,24.58 26.61,24.58 arc24 26.48,24.55 25.09,23.92 arc21 24.41,23.52
SII-MISO  (via drill 0.4 pad 0.7)
  TOP 0.254: v48.32,20.06 48.32,19.51 48.32,19.38 IC1.1 47.85,18.97 47.73,18.97 arc69 47.61,18.89 v47.17,17.75 | v17.76,6.94 17.67,7.47 arc-9 17.67,7.5 17.67,7.62 Q5.2 16.91,7.62 16.78,7.62 arc25 16.73,7.61 v11.17,5.04 10.69,4.62 arc-41 10.6,4.59 10.47,4.59 R26.3
  TOP-1 0.254: A2.5.PB1 43.97,6.71 arc-9 43.81,6.64 35.11,3.69 arc26 34.98,3.61 34.49,3.12 arc31 34.4,2.97 34.18,2.11 arc-31 34.09,1.96 33.6,1.47 arc-45 33.37,1.37 32.67,1.37 | 32.67,1.37 | 32.67,1.37 27.59,1.37 arc-25 27.45,1.4 23.36,3.34 arc2 23.32,3.36 22.4,3.75 arc-22 22.03,4 20.79,5.24 arc16 20.64,5.36 v17.76,6.94
  BOTTOM+1 0.254: U$2.P$22 23.53,44.26 arc-29 24.13,44.41 36.83,44.41 arc-76 38.02,43.48 38.18,42.88 arc76 39.37,41.95 41.91,41.95 arc29 42.51,42.1 U$2.P$13 | v11.17,5.04 9.54,5.31 arc-15 9.37,5.36 8.09,5.94 arc-1 8.08,5.94 A3.5.PB1
  BOTTOM 0.254: v47.17,17.75 46.55,14.78 arc7 46.53,14.7 A2.5.PB1 | U$2.P$13 48.3,22.77 arc-11 48.32,22.64 v48.32,20.06
VCC
  TOP 0.254: 37.35,2.98 30.75,9.3 arc44 30.66,9.34 30.53,9.34 R4.8 R4.7 R4.6 R4.5 27.89,9.34 27.89,9.21 arc-32 27.87,9.14 26.4,6.75 arc-54 25.49,6.2 22.77,5.99 arc44 21.99,5.61 20.82,4.3 arc-8 20.75,4.24 20.01,3.62 arc-12 19.95,3.58 18.67,2.91 arc-7 18.6,2.88 17.91,2.61 arc-21 17.8,2.59 16.78,2.59 arc-74 16.46,2.83 16.25,3.56 arc14 16.24,3.58 15.96,4.08 15.94,4.1 arc15 15.92,4.13 15.5,4.55 arc15 15.48,4.57 15.35,4.64 | SW4.O 3.53,42.67 3.53,42.54 arc-38 3.5,42.46 1.29,39.62 arc49 1.14,38.99 1.6,37.23 arc-11 1.66,36.86 1.66,35.86 1.37,17.54 arc1 1.37,17.53 1.37,14.99 arc1 1.37,14.96 1.47,10.14 arc52 1.9,9.3 3.24,8.3 arc-49 3.71,7.45 3.91,4.74 arc63 4.62,3.75 5.54,3.36 arc-14 5.78,3.23 7.96,1.61 arc37 8.7,1.36 9.95,1.36 arc45 10.84,1.73 11.16,2.05 arc24 11.34,2.33 11.81,3.57 arc-9 11.81,3.59 12.11,4.1 arc-15 12.13,4.13 12.55,4.55 arc-15 12.58,4.57 12.6,4.58 | 12.6,4.58 | 12.6,4.58 13.09,4.86 arc-15 13.12,4.88 13.15,4.88 | 13.15,4.88 | 13.15,4.88 13.7,5.03 arc-15 13.73,5.03 13.76,5.03 14.32,5.03 arc-15 14.36,5.03 14.93,4.88 arc-15 14.96,4.86 15.35,4.64 | 15.35,4.64
VCC_OFF
  TOP 0.254: Q2.1 14.86,18.02 14.98,18.02 arc11 15.01,18.02 30.16,20.91 arc100 30.67,21.82 30.4,22.55 arc11 30.3,22.76 27.96,26.52 arc10 27.93,26.57 20.67,34.74 arc-27 20.4,35.26 20.25,35.86 arc22 20.04,36.29 15.52,42.45 arc-112 16.21,44.38 36.73,49.45 37.08,49.53 37.26,49.64 37.34,49.66 37.41,49.73 37.77,50.09 arc31 37.86,50.24 37.83,51.23 arc-31 37.92,51.38 38.41,51.87 arc-45 38.77,52.1 39.46,52.1 arc-28 40,52.06 41.54,50.73

## Text on the board
Name: |&lt; digital 13-8&gt;| | |&lt; digital 7-2 &gt;| | gnd | TX | RX | HV | ISP | |&lt;8 pin&gt;| | |&lt;--14 pin--&gt;| | 5V | 3.3V | TAMI ATtiny / HV / ISP / Programmer | test | load | |&lt;8 pin&gt;| | |&lt;--14 pin--&gt;| | PB0 | PB1 | PB2 | PB3 | ISP | PB4 | PB5 | ATTami | HV | H.B. | prog | ERR | ATTami | rst | 3v3 | 5V | -GND- | VIN | |&lt; analog 0-5 &gt;|